# Altium PCB PCB_small.PcbDoc
Units mil, origin at the board's own origin, x right, y up, seen from the top; angles counter-clockwise.
Board outline 3000 x 3000 mil, 2 copper layers (Top Layer, Bottom Layer); 32 components, 83 nets, 236 pads, 150 vias.
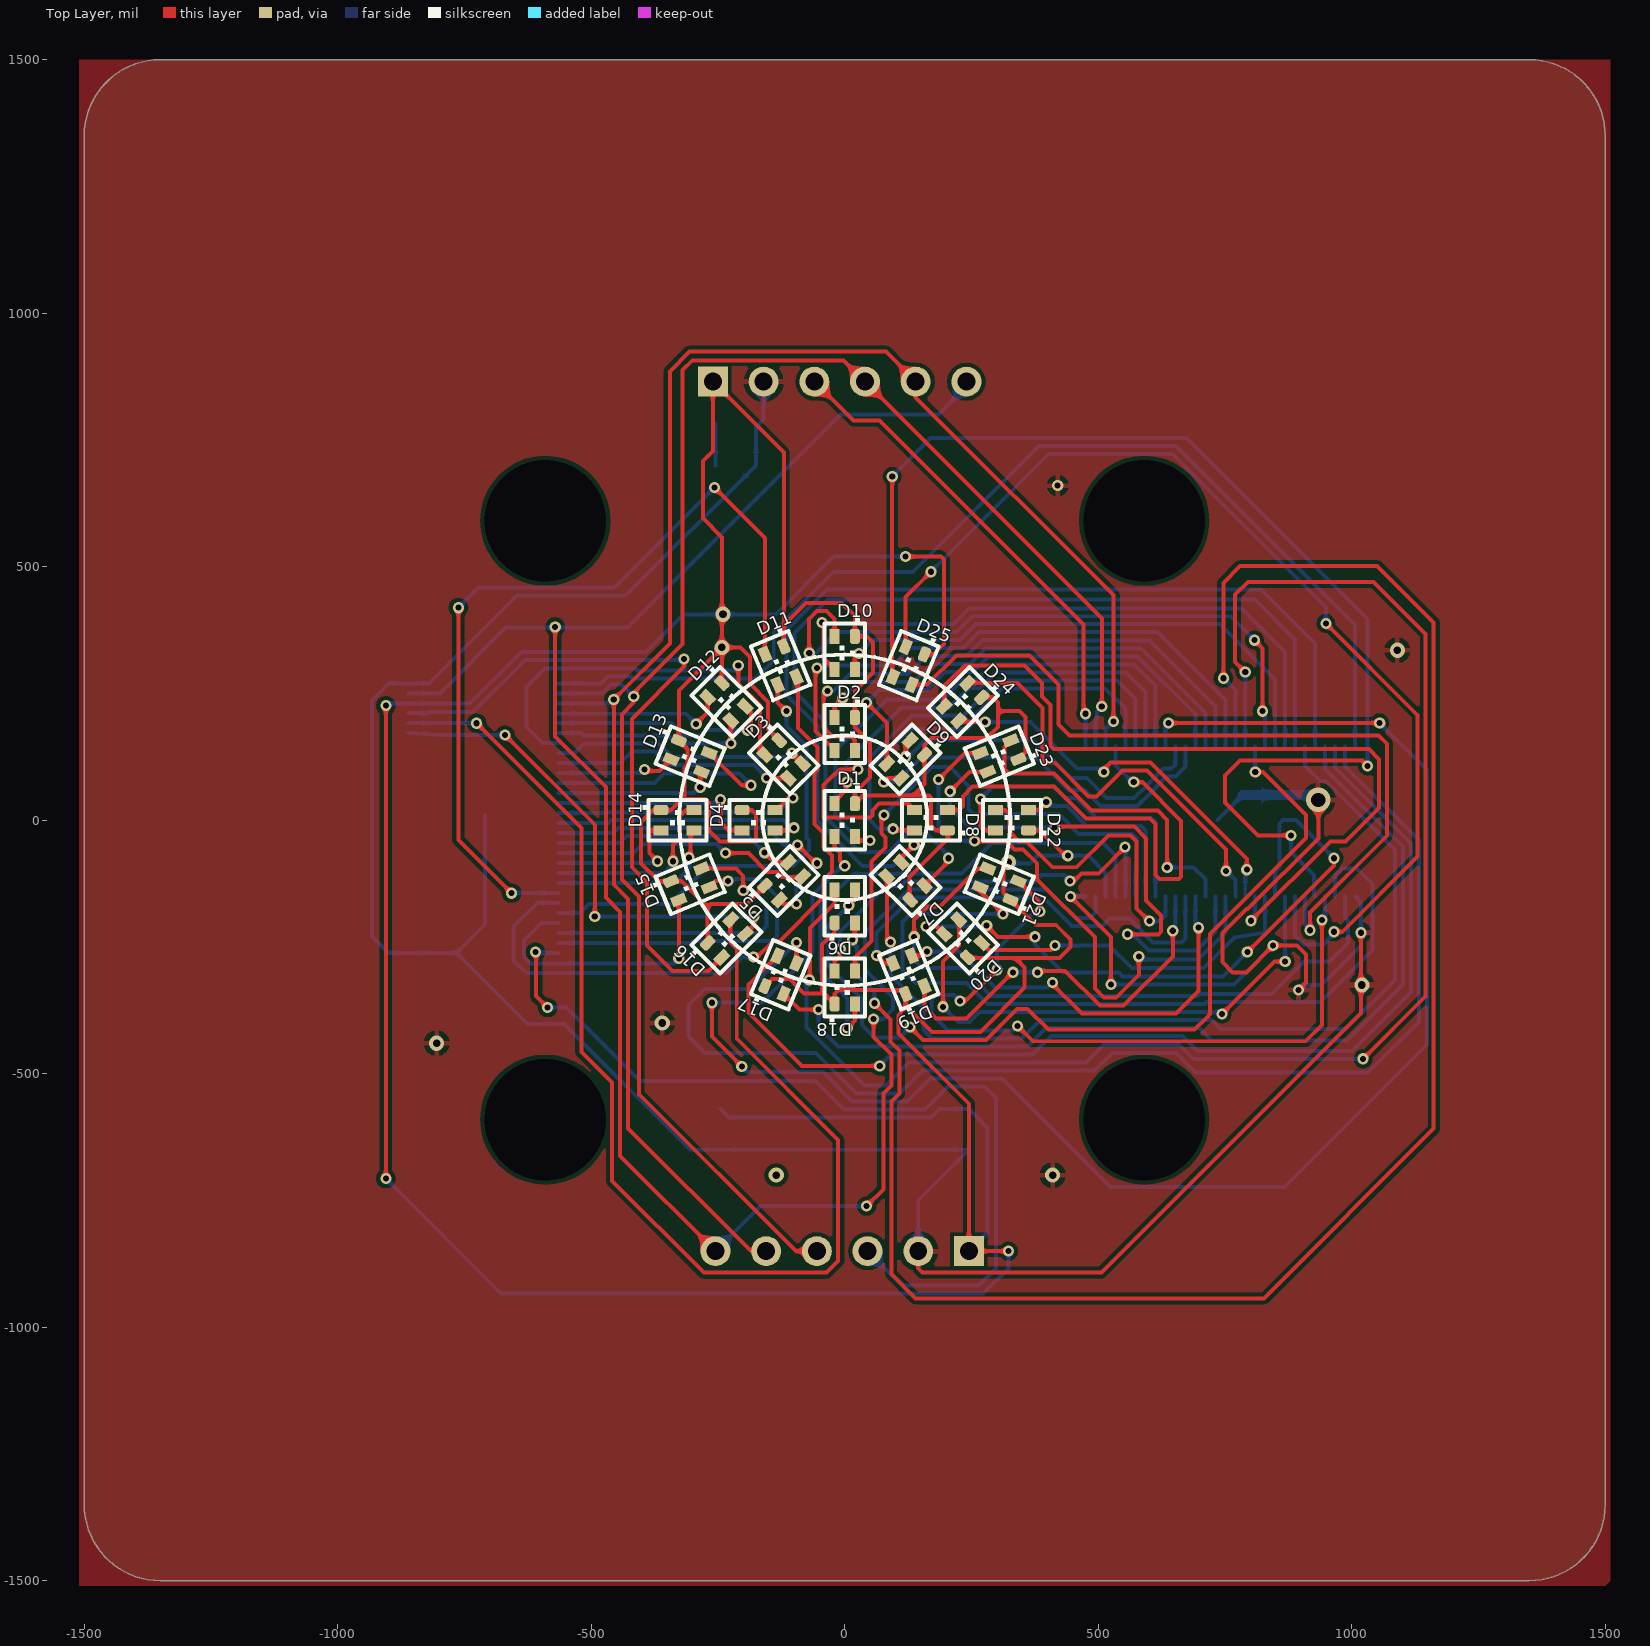
[diagram p0: Top Layer view]
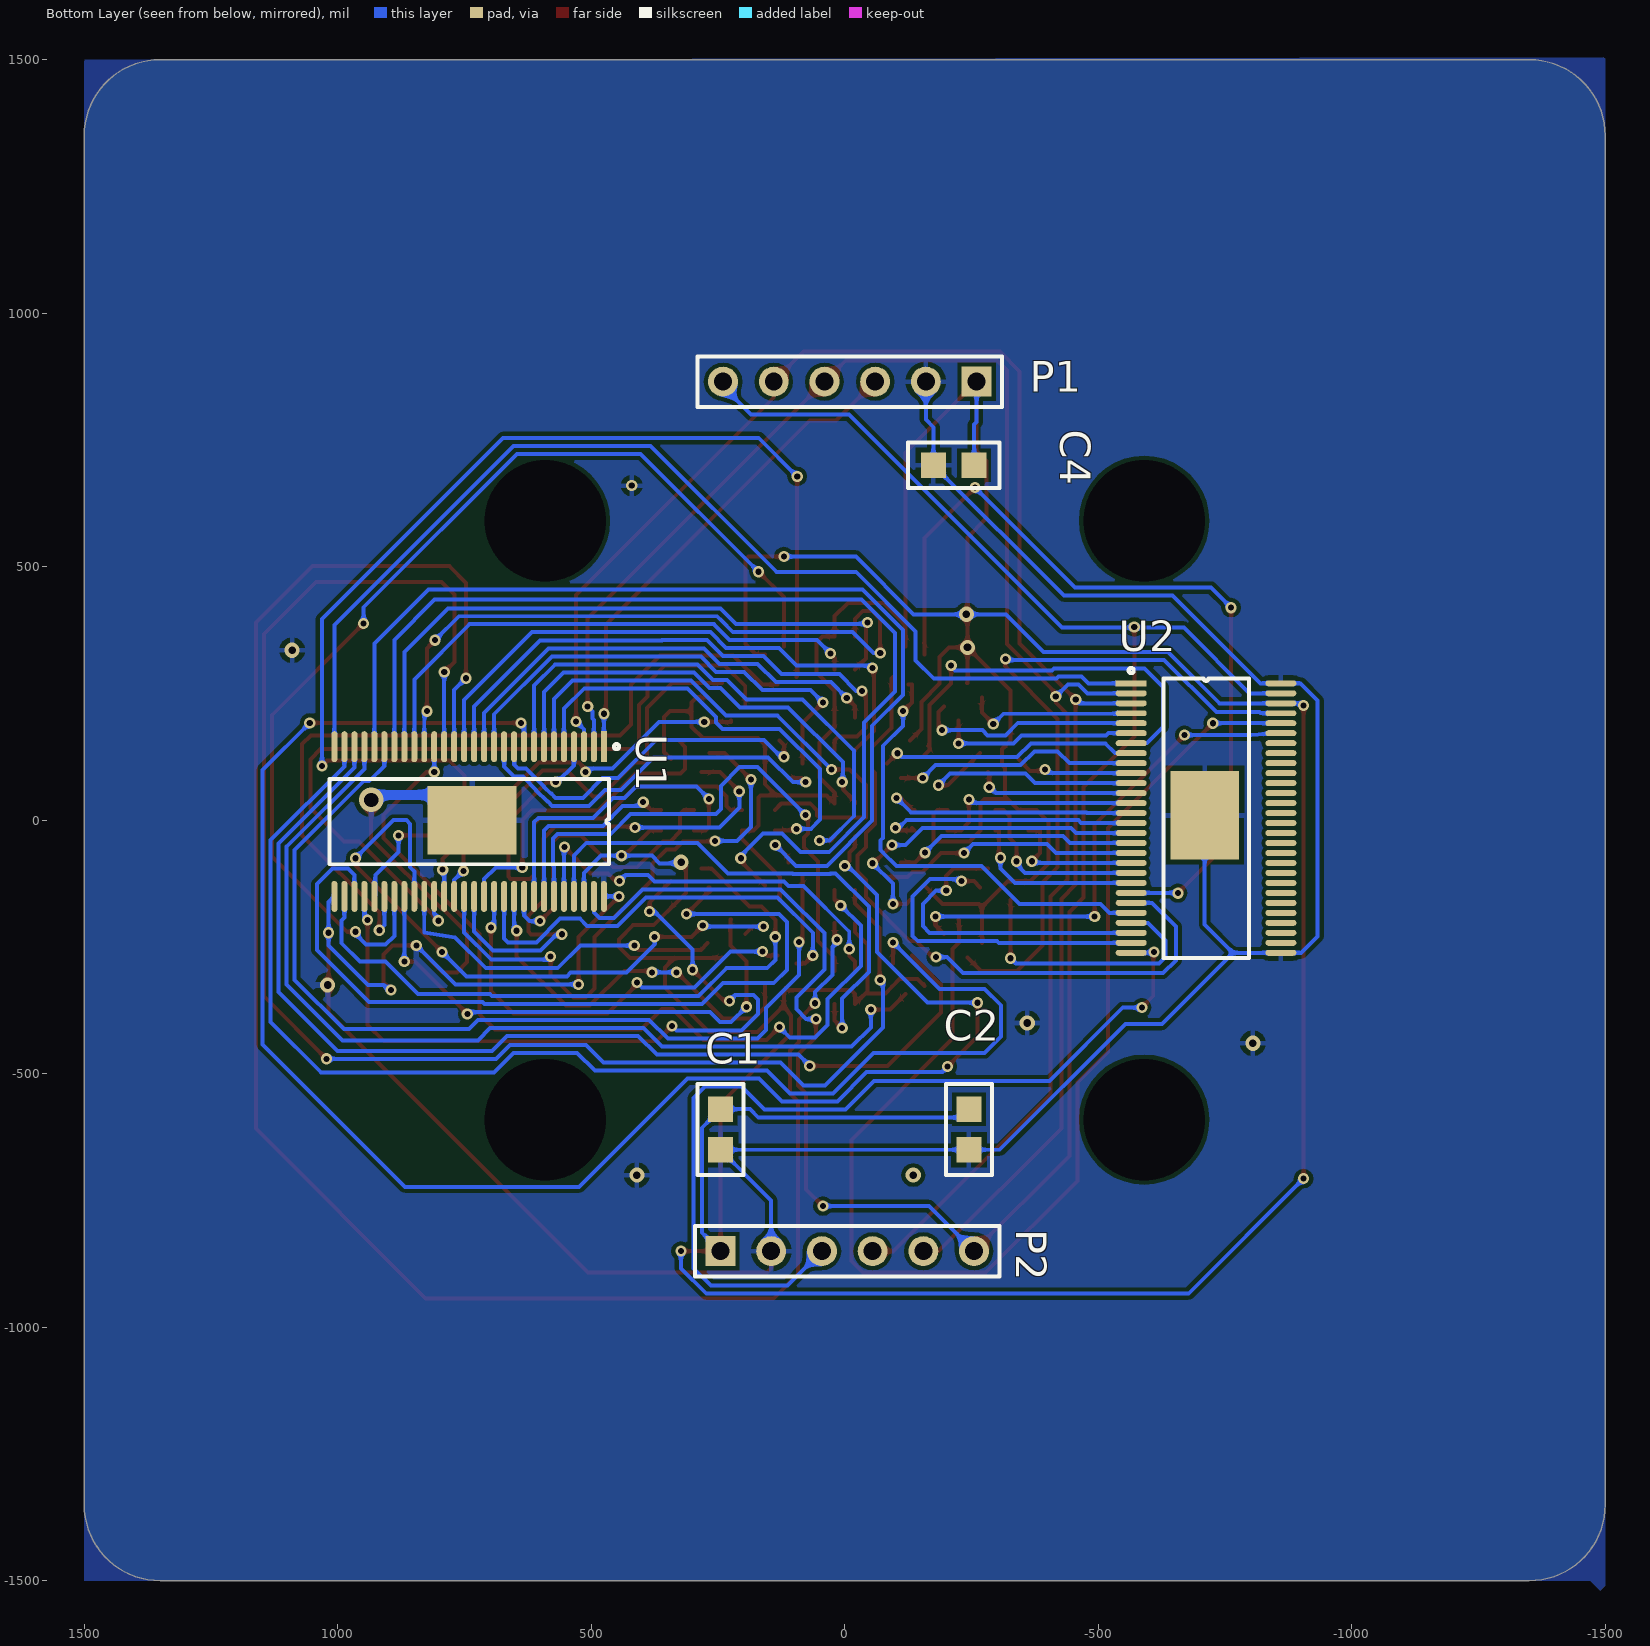
[diagram p1: Bottom Layer view, seen from below]

## Layer stack, top to bottom
Top Solder: solder mask 0.4, Solder Resist, Dk 3.5
Top Layer: signal copper 1.4
Dielectric 1: dielectric 12.6, FR-4, Dk 4.8
Bottom Layer: signal copper 1.4
Bottom Solder: solder mask 0.4, Solder Resist, Dk 3.5

## Board outline
-1350,-1500 cw(c-1350,-1350) -1500,-1350 -1500,1350 cw(c-1350,1350) -1350,1500 1350,1500 cw(c1350,1350) 1500,1350 1500,-1350 cw(c1350,-1350) 1350,-1500

## Design rules (kind name [scope] priority, off if disabled: settings)
Clearance [All] p1: gap=7.87 ignorepadtopadclearanceinfootprint=FALSE except(0: Arc-Hole Track-Hole SMDPad-Hole THPad-Hole Via-Hole Fill-Hole Poly-Hole Region-Hole Text-Hole)
ComponentClearance [All] p1: gap=0 collisioncheckmode=3 verticalgap=0 showdistances=FALSE
HoleSize [All] p1: absolutevalues=TRUE maxlimit=200 minlimit=5 maxpercent=80.000 minpercent=20.000
HoleToHoleClearance [All] p1: gap=7.87 allowstackedmicrovias=TRUE
MinimumSolderMaskSliver [All] p1: minsoldermaskwidth=7.87
PolygonConnect [All] p1: connectstyle=Relief reliefconductorwidth=10 reliefentries=4 polygonreliefangle="90 Angle" airgapwidth=10
RoutingVias [All] p1: holewidth=12 width=22 viastyle="Through Hole" minholewidth=10 minwidth=10 maxholewidth=50 maxwidth=80
SilkToSilkClearance [All] p1: silktosilkclearance=7.87
SilkToSolderMaskClearance [IsPad] p1: minsilkscreentomaskgap=7.87 clearancetoexposedcopper=TRUE
SolderMaskExpansion [All] p1: expansion=4
Width [All] p1: maxlimit=80 minlimit=5 preferedwidth=7.87
24 further rules are at their usual default settings.

## Components (designator, comment, footprint, x,y, rotation, side; value= is the part's Value field where it differs from the comment)
C1 "Cap" CAP_0805 245,-610 r90 bottom
C2 "Cap" CAP_0805 -245,-610 r90 bottom
C4 "Cap" CAP_0805 -215,700 r180 bottom
D1 "LED1616" LED1616 0,0 r90 top
D2 "LED1616" LED1616 0,170 r90 top
D3 "LED1616" LED1616 -120.21,120.21 r135 top
D4 "LED1616" LED1616 -170,0 r180 top
D5 "LED1616" LED1616 -120.21,-120.21 r225 top
D6 "LED1616" LED1616 0,-170 r270 top
D7 "LED1616" LED1616 120.21,-120.21 r315 top
D8 "LED1616" LED1616 170,0 r0 top
D9 "LED1616" LED1616 120.21,120.21 r45 top
D10 "LED1616" LED1616 0,330 r90 top
D11 "LED1616" LED1616 -126.29,304.88 r112.5 top
D12 "LED1616" LED1616 -233.35,233.35 r135 top
D13 "LED1616" LED1616 -304.88,126.29 r157.5 top
D14 "LED1616" LED1616 -330,0 r180 top
D15 "LED1616" LED1616 -304.88,-126.29 r202.5 top
D16 "LED1616" LED1616 -233.35,-233.35 r225 top
D17 "LED1616" LED1616 -126.29,-304.88 r247.5 top
D18 "LED1616" LED1616 0,-330 r270 top
D19 "LED1616" LED1616 126.29,-304.88 r292.5 top
D20 "LED1616" LED1616 233.35,-233.35 r315 top
D21 "LED1616" LED1616 304.88,-126.29 r337.5 top
D22 "LED1616" LED1616 330,0 r0 top
D23 "LED1616" LED1616 304.88,126.29 r22.5 top
D24 "LED1616" LED1616 233.35,233.35 r45 top
D25 "LED1616" LED1616 126.29,304.88 r67.5 top
P1 "Header 6" HDR1X6 -260,865 r0 bottom
P2 "Header 6" HDR1X6 245,-850 r180 bottom
U1 "Tlc5955" TCL5955-2 475,145 r270 bottom
U2 "Tlc5955" TCL5955-2 -565,270 r180 bottom

## Footprints (in the part's own frame and the unit in brackets; to place one, negate y for a bottom-side part, rotate by r counter-clockwise, add the part's x,y. Pads: shape width x height; smd on the part's side, far side on the other; paste and mask are expansions set on the pad)
CAP_0805 [mil]
  rect 50x50 smd: 1(-40,0) 2(40,0)
  silkscreen extent -90,-45 90,45
HDR1X6 [mm] "Connector; Header; 6 Position"
  rect 1.5x1.5 hole 0.9: 1(0,0)
  round 1.5 hole 0.9: 2(2.54,0) 3(5.08,0) 4(7.62,0) 5(10.16,0) 6(12.7,0)
  silkscreen extent -1.27,-1.27 13.97,1.27
LED1616 [mil]
  rrect50% 29.53x19.68 smd: 1(32.5,-20)
  rect 29.53x19.68 smd: 2(-32.5,-20) 3(-32.5,20) 4(32.5,20)
  silkscreen extent -58,-40 70,40
TCL5955-2 [mm]
  rect 1.55x0.3 smd: 1(0,0)
  oval 1.55x0.3 smd: 2(0,-0.5) 3(0,-1) 4(0,-1.5) 5(0,-2) 6(0,-2.5) 7(0,-3) 8(0,-3.5) 9(0,-4) 10(0,-4.5) 11(0,-5) 12(0,-5.5) 13(0,-6) 14(0,-6.5) 15(0,-7) 16(0,-7.5) 17(0,-8) 18(0,-8.5) 19(0,-9) 20(0,-9.5) 21(0,-10) 22(0,-10.5) 23(0,-11) 24(0,-11.5) 25(0,-12) 26(0,-12.5) 27(0,-13) 28(0,-13.5) 29(7.5,-13.5) 30(7.5,-13) 31(7.5,-12.5) 32(7.5,-12) 33(7.5,-11.5) 34(7.5,-11) 35(7.5,-10.5) 36(7.5,-10) 37(7.5,-9.5) 38(7.5,-9) 39(7.5,-8.5) 40(7.5,-8) 41(7.5,-7.5) 42(7.5,-7) 43(7.5,-6.5) 44(7.5,-6) 45(7.5,-5.5) 46(7.5,-5) 47(7.5,-4.5) 48(7.5,-4) 49(7.5,-3.5) 50(7.5,-3) 51(7.5,-2.5) 52(7.5,-2) 53(7.5,-1.5) 54(7.5,-1) 55(7.5,-0.5) 56(7.5,0)
  rect 3.429x4.445 smd: 57(3.683,-6.604)
  silkscreen extent -0.13,-13.75 5.89,0.76

## Part data
C1 C2 C4: "Capacitor"
D1 D2 D3 D4 D5 D6 D7 D8 D9 D10 D11 D12 D13 D14 D15 D16 D17 D18 D19 D20 D21 D22 D23 D24 D25: library part LED
P1 P2: "Header, 6-Pin"
U1 U2: library part Tlc5955_2

## Free pads (board coordinates)
  round 78.74 hole 240: 0(-590.55,-590.55) 0(-590.55,590.55) 0(590.55,-590.55) 0(590.55,590.55)

## Via types
v1: diameter 22, hole 12, Top Layer to Bottom Layer, 140 vias
v2: diameter 30, hole 15, Top Layer to Bottom Layer, 9 vias
v3: diameter 48, hole 28, Top Layer to Bottom Layer, 1 vias

## Nets (pads, with @x,y where several pads share a name; then routed paths per layer and width w, separated by ;. In a path a pad name is that pad's centre, name@x,y a point inside that pad or via, vN(x,y) a via of type N, cw(c..) or ccw(c..) an arc to the next point about the centre after c; other vN are vias at no path point)
D1_B: D1.4 U1.7 | length 879.7
  Top Layer w7.87: D1.4 -20,37 2.66,59.66 2.66,72.66 v1(5,75)
  Bottom Layer w7.87: v1(5,75) 3.46,76.54 3.46,114.49 111.53,222.56 206.63,222.56 245.14,261.07 266.53,261.07 296.95,291.5 554.23,291.5 593.11,252.62 U1.7
D1_G: D1.3 U1.9 | length 3397
  Top Layer w7.87: v1(-262,-360) -262,-427 v1(-203,-486) ; D1.3 -20,-52.73 -9.25,-63.48 -9.25,-80.75 v1(0,-90) v1@-6,-90 ; v1(638.75,191.75) v1(1055.14,191.75)
  Bottom Layer w7.87: v1(-262,-360) -163.56,-360 -63.22,-259.66 -63.22,-147.22 v1@-6,-90 ; v1(-203,-486) -191.94,-497.06 -43.13,-497.06 14.69,-554.88 123.31,-554.88 168.7,-509.49 310.49,-509.49 524,-723 867,-723 1147.99,-442.01 1147.99,98.9 v1(1055.14,191.75) ; U1.9 632.48,185.48 v1(638.75,191.75)
D1_R: D1.2 U1.8 | length 1089.1
  Top Layer w7.87: D1.2 27.5,-40 v1(50,-40)
  Bottom Layer w7.87: v1(50,-40) 30,-40 -17.81,7.81 -17.81,137.55 82.95,238.31 193.31,238.31 231.82,276.82 260.01,276.82 290.43,307.24 570.97,307.24 612.79,265.42 U1.8
D2_B: D2.4 U1.13 | length 920.1
  Top Layer w7.87: D2.4 -20,225 v1(-4,241)
  Bottom Layer w7.87: v1(-4,241) 27.16,272.16 135.77,272.16 171.93,308.32 246.96,308.32 277.39,338.74 584.02,338.74 711.22,211.54 U1.13
D2_G: D2.3 U1.15 | length 1161.1
  Top Layer w7.87: v1(-55,300) -57.4,297.6 -57.4,176.32 -20,138.92 D2.3
  Bottom Layer w7.87: v1(-55,300) -50,305 7.38,305 95,305 129.81,339.81 233.91,339.81 264.85,370.75 300.75,370.75 616.55,370.75 750.59,236.71 U1.15
D2_R: D2.2 U1.14 | length 1107.2
  Top Layer w7.87: v1(-34.13,255) -41.65,247.47 -41.65,222.16 -41.65,182.84 -23.81,165 12,165 20,157 D2.2
  Bottom Layer w7.87: v1(-34.13,255) -22.26,255 10.64,287.9 124.24,287.9 124.37,288.03 160.4,324.06 240.44,324.06 271.37,355 310,355 360,355 360.51,354.49 601.06,354.49 730.9,224.65 U1.14
D3_B: D6.4 U1.16 | length 3774.4
  Top Layer w7.87: v1(15,-235.67) 18.67,-235.67 20,-234.34 D6.4 ; v1(58.44,-361.06) 90.44,-393.06 90.44,-437 107.56,-454.12 107.56,-539.13 92,-554.69 92,-895 140,-943 827,-943 1161.5,-608.5 1161.5,389.5 1050,501 780,501 747,468 v1(747,280)
  Bottom Layer w7.87: v1(15,-235.67) 15,-241.34 24.21,-250.55 24.21,-305.03 58.44,-339.26 v1(58.44,-361.06) ; v1(747,280) 770.27,256.73 U1.16
D3_G: D6.3 U1.18 | length 1742.6
  Top Layer w7.87: v1(8,-168) 20,-156 D6.3 ; v1(129,-408) 154.31,-433.31 278.63,-433.31 339.93,-372 360.81,-372 401.99,-413.18 689.66,-413.18 714.14,-388.7 720.81,-382.03 720.81,-224.19 910,-35 910,10 825,95 v1(809.64,95)
  Bottom Layer w7.87: v1(8,-168) -31.72,-207.72 -31.73,-287.27 33.77,-352.77 33.77,-404 58.33,-428.56 108.44,-428.56 v1(129,-408) ; v1(809.64,95) U1.18
D3_R: D6.2 U1.17 | length 3112.3
  Top Layer w7.87: v1(-70,-315) -68.82,-313.82 -68.82,-212.82 -20,-164 D6.2 ; v1(789.96,292.33) 770,312.29 770,445 795,470 1043,470 1145.75,367.25 1145.75,-347.25 v1(1022.38,-470.62)
  Bottom Layer w7.87: v1@-68.82,-313.82 v1(-70,-315) -75.53,-320.53 -75.53,-409.31 38.54,-523.39 81.23,-523.39 126.62,-477.99 475.62,-477.99 510.63,-442.99 660.14,-442.99 687.77,-470.62 v1(1022.38,-470.62) ; U1.17 v1(789.96,292.33)
D4_B: D7.4 U1.22 | length 2030.1
  Top Layer w7.87: D7.4 205,-81.38 v1(205,-75)
  Bottom Layer w7.87: v1(205,-75) 205,-70 161.19,-26.19 123.81,-26.19 87.19,-62.81 30.54,-62.81 -38.25,5.98 -38.25,192.78 -98.86,253.4 -98.86,368.86 -32.73,435 809.25,435 888.38,355.87 U1.22
D4_G: D7.3 U1.24 | length 2015.8
  Top Layer w7.87: D7.3 111.37,-73.63 136,-49 v1(137,-49)
  Bottom Layer w7.87: v1@136,-49 v1(137,-49) 96,-90 35,-90 -54,-1 -54,186.26 -115,247.26 -115,375 -35,455 226.28,455 821,455 881,395 927.75,348.25 U1.24
D4_R: D7.2 U1.23 | length 1878.8
  Top Layer w7.87: D7.2 83.09,-242.09 85.17,-240 v1(90,-240)
  Bottom Layer w7.87: v1(90,-240) 90,-305 155,-370 155,-374 155,-413.75 172,-430.75 349,-430.75 385.68,-394.06 723,-394.06 740.94,-412 988,-412 1085,-315 1085,-58.88 949.31,76.81 938.19,76.81 908.07,106.93 U1.23
D5_B: D8.4 U1.4 | length 949.3
  Top Layer w7.87: D8.4 225,20 233,28 233,47 252,66 412.81,66 475.87,2.94 602.37,2.94 613,-7.69 613,-108 621,-116 659,-116 663.59,-111.41 663.59,-1.15 587.44,75 v1(570,75)
  Bottom Layer w7.87: U1.4 534.05,108 567.05,75 v1(570,75)
D5_G: D8.3 U1.6 | length 1076.7
  Top Layer w7.87: v1(26.27,100) -9,100 -19,90 -20,91 -41.66,69.34 -41.66,5 50,5 54.67,9.67 54.67,19.45 68.03,32.81 124.69,32.81 D8.3
  Bottom Layer w7.87: v1(26.27,100) 133.08,206.81 234.54,206.81 303.48,275.75 536.68,275.75 573.42,239 U1.6
D5_R: D8.2 U1.5 | length 865.4
  Top Layer w7.87: v1(95,-17) 98,-20 D8.2
  Bottom Layer w7.87: v1(95,-17) 67,-17 49.08,0.92 49.08,100.54 128.54,180 241,180 254,193 254,204 310,260 513.74,260 553.74,220 U1.5
D6_B: D9.4 U1.10 | length 692
  Top Layer w7.87: v1(120,125) 120,148.28 D9.4
  Bottom Layer w7.87: v1(120,125) 125.88,125 159.15,158.27 371.73,158.27 446.75,83.25 477.37,83.25 516.43,44.19 570.48,44.19 578.48,52.19 579.45,52.19 592.81,65.55 592.81,66.52 616.81,90.52 628.29,102 644,102 652.16,110.16 U1.10
D6_G: D9.3 U1.12 | length 934.6
  Top Layer w7.87: v1(43,232) 83.09,191.91 D9.3
  Bottom Layer w7.87: v1(43,232) 67.41,256.41 162.1,256.41 198.26,292.57 253.48,292.57 283.91,322.99 577.5,322.99 691.53,208.95 U1.12
D6_R: D9.2 U1.11 | length 763.9
  Top Layer w7.87: v1(77,75) 85.09,83.09 D9.2
  Bottom Layer w7.87: v1(77,75) 102.26,75 150.9,123.64 377.36,123.64 441.07,59.93 472.68,59.93 504.17,28.44 577,28.44 585,36.44 585.97,36.44 608.56,59.03 608.56,60 632.56,84 634.56,86 652,86 671.85,105.85 U1.11
D7_B: D10.4 U1.19 | length 1311.2
  Top Layer w7.87: v1(-70,330) -70,397.26 -54.45,412.81 -35.55,412.81 -20,397.26 D10.4 ; v1(808,355) 824,339 v1(824,215)
  Bottom Layer w7.87: v1(-70,330) -56.38,330 -15.07,371.31 220.87,371.31 242.07,392.51 251.8,402.24 277.24,402.24 654.67,402.24 760.76,402.24 v1(808,355) ; v1(824,215) 829.33,209.67 U1.19
D7_G: D10.3 U1.21 | length 1255.1
  Top Layer w7.87: v1(-45,390) -39.4,384.4 -41.65,382.16 -41.65,319.15 D10.3
  Bottom Layer w7.87: v1(-45,390) -42.06,387.06 214.35,387.06 244.77,417.48 245.28,417.99 267.99,417.99 670.41,417.99 782.71,417.99 868.7,332 U1.21
D7_R: D10.2 U1.20 | length 1057.5
  Top Layer w7.87: D10.2 20,321 v1(28,329)
  Bottom Layer w7.87: v1(28,329) 54.56,355.56 227.39,355.56 257.82,385.98 258.33,386.5 286.5,386.5 638.92,386.5 740.32,386.5 849.01,277.8 U1.20
D8_B: D17.4 U1.25 | length 1888.1
  Top Layer w7.87: D17.4 -89.25,-373.56 v1(-51.44,-373.56)
  Bottom Layer w7.87: v1(-51.44,-373.56) -51.44,-408.56 -13.5,-446.5 360.25,-446.5 396.93,-409.81 699.25,-409.81 723.62,-434.18 990.82,-434.18 1100.75,-324.25 1100.75,-52.36 947.44,100.95 U1.25
D8_G: D17.3 U1.27 | length 2547.7
  Top Layer w7.87: D17.3 v1(-95.37,-241)
  Bottom Layer w7.87: v1(-95.37,-241) -187.37,-333 -276,-333 -308,-365 -308,-426.74 -276,-458.74 -57.15,-458.74 23.24,-539.13 107.56,-539.13 152.95,-493.74 492.88,-493.74 527.88,-458.74 653.23,-458.74 691.99,-497.5 1032.5,-497.5 1132.24,-397.76 1132.24,-39.31 986.81,106.12 U1.27
D8_R: D17.2 U1.26 | length 2115.5
  Top Layer w7.87: D17.2 -154.98,-289.86 -155.22,-289.86 -164.91,-299.54 -182.25,-316.88 -189.43,-324.06 -189.43,-379.15 -84,-484.57 v1(69,-484.57)
  Bottom Layer w7.87: v1(69,-484.57) 91.33,-462.24 370.65,-462.24 407.34,-425.56 666.59,-425.56 695.9,-454.87 1000.13,-454.87 1116.5,-338.5 1116.5,-45.84 967.12,103.53 U1.26
D9_B: D18.4 U1.53 | length 1040.2
  Top Layer w7.87: v1(5,-410) 20,-395 D18.4
  Bottom Layer w7.87: v1(5,-410) 5,-352 -47.47,-299.53 -47.47,-266.18 -47.47,-170.47 18,-105 27.73,-105 28.48,-105.75 102.52,-105.75 103.27,-105 230,-105 290,-45 340,-45 509.81,-45 534.05,-69.24 U1.53
D9_G: D18.3 U1.51 | length 1075.5
  Top Layer w7.87: D18.3 20,-270.81 52.81,-238 52.81,-81.21 80,-54.03 80,-34.26 72.19,-26.45 72.19,4.71 v1(77.48,10)
  Bottom Layer w7.87: v1(77.48,10) 172,104.52 207.35,104.52 244,67.87 244,22.19 253.8,12.39 422.31,12.39 461.5,-26.8 566.62,-26.8 575.81,-36 575.81,-89.42 573.42,-91.81 U1.51
D9_R: D18.2 U1.52 | length 820.5
  Top Layer w7.87: D18.2 -20,-279 -8.91,-267.91 v1(-8.91,-254.01) ; v1(444.31,-120) 452.27,-120 467.27,-105 501,-105 v1(553,-53)
  Bottom Layer w7.87: v1(-8.91,-254.01) -8.91,-220 81.68,-129.4 111.06,-129.4 119.71,-120.75 375.63,-120.75 388.19,-108.19 432.5,-108.19 v1(444.31,-120) ; v1(553,-53) 553.74,-53.74 U1.52
D10_B: D19.4 U1.47 | length 769.6
  Top Layer w7.87: D19.4 157.2,-368.07 180.05,-390.91 240.09,-390.91 331,-300 v1(332,-300) ; v1(380,-300) 382.81,-297.19 434.2,-297.19 434.42,-296.98 503.37,-365.93 550.19,-365.93 647,-269.12 v1(647,-218)
  Bottom Layer w7.87: v1@331,-300 v1(332,-300) v1(380,-300) ; v1(647,-218) 652.16,-212.84 U1.47
D10_G: D19.3 U1.45 | length 931.6
  Top Layer w7.87: D19.3 153.93,-267.2 v1(162,-259.13) ; v1(410,-320) v1@405.91,-320 ; v1(698,-212) 698,-337.31 653.63,-381.68 467.59,-381.68 ; v1@405.91,-320 407.96,-322.04 467.59,-381.68 ; v1@405.91,-320 467.59,-381.68
  Bottom Layer w7.87: v1(162,-259.13) 225.69,-259.13 296.56,-330 400,-330 v1(410,-320) ; U1.45 691.53,-205.53 v1(698,-212)
D10_R: D19.2 U1.46 | length 856.2
  Top Layer w7.87: v1(63,-267) 78.51,-282.51 D19.2
  Bottom Layer w7.87: v1(63,-267) 63,-222 132.76,-152.24 392.24,-152.24 448.35,-208.35 508.47,-208.35 522.63,-194.19 561.26,-194.19 607.9,-240.82 664.47,-240.82 671.85,-233.44 U1.46
D11_B: D20.4 U1.38 | length 683.8
  Top Layer w7.87: D20.4 283.93,-255.65 406.54,-255.65 v1(415,-247.18)
  Bottom Layer w7.87: v1(415,-247.18) 521.55,-247.18 566.36,-292 707.69,-292 768.44,-231.25 829.33,-221.67 U1.38
D11_G: D20.3 U1.36 | length 1054.1
  Top Layer w7.87: v1(194,-368.06) 194,-279 225.43,-247.57 225.43,-196.22 D20.3 ; v1@740.7,-378.32 v1(744.38,-382) 847.63,-278.75 v1(868.7,-278.75)
  Bottom Layer w7.87: v1(194,-368.06) 224.34,-398.4 246.02,-398.4 266.11,-378.32 v1@740.7,-378.32 ; v1(868.7,-278.75) U1.36
D11_R: D20.2 U1.37 | length 1291.3
  Top Layer w7.87: v1(160,-210) 181.72,-210 D20.2 ; v1(280,-208) 302,-230 v1(375,-230) ; v1(794,-260) 965,-89 v1(965,-75)
  Bottom Layer w7.87: v1(160,-210) 278,-210 v1(280,-208) ; v1(375,-230) 375,-245 430.7,-300.7 540.82,-300.7 548.12,-308 746,-308 v1(794,-260) ; U1.37 849.01,-100.98 857.19,-92.81 857.19,-7.19 864.38,0 890,0 v1(965,-75)
D12_B: D21.4 U1.32 | length 1493.8
  Top Layer w7.87: v1(227.5,-356.5) 238.5,-356.5 v1(300,-295) ; v1(341,-406) 371,-436 909,-436 941,-404 v1(941,-197) ; D21.4 385,-162.69 v1(385,-180)
  Bottom Layer w7.87: v1(227.5,-356.5) 216,-345 180,-345 171,-354 171,-382 204,-415 332,-415 v1(341,-406) ; v1(300,-295) 300,-255 375,-180 v1(385,-180) ; v1(941,-197) 947.44,-190.56 U1.32
D12_G: D21.3 U1.30 | length 1289.1
  Top Layer w7.87: v1(137,-230) 137,-197 164.07,-169.93 188,-169.93 262.56,-95.37 D21.3
  Bottom Layer w7.87: v1(137,-230) 137,-276 153,-292 233.27,-292 288.08,-346.81 696.19,-346.81 700,-343 842,-343 906,-279 956,-279 992.29,-242.71 992.29,-197.48 986.81,-192 U1.30
D12_R: D21.2 U1.31 | length 1634.6
  Top Layer w7.87: D21.2 269,-132.33 269,-142 v1(312,-185)
  Bottom Layer w7.87: v1(312,-185) 130,-185 114,-201 114,-295.31 140,-321.31 240.31,-321.31 281.56,-362.56 710.44,-362.56 714,-359 865,-359 938,-359 1040.81,-256.19 1040.81,-125.81 1009.88,-94.88 980.12,-94.88 967.12,-107.88 U1.31
D13_B: D22.4 U1.50 | length 390.3
  Top Layer w7.87: D22.4 382,20 v1(397.5,35.5)
  Bottom Layer w7.87: v1(397.5,35.5) 404.87,28.13 438,28.13 477.19,-11.06 584.17,-11.06 593.11,-20 U1.50
D13_G: D22.3 U1.48 | length 617.3
  Top Layer w7.87: D22.3 317,20 325,12 325,-22.6 344.06,-41.65 358.21,-41.65 361.56,-45 409.37,-92.81 457.19,-92.81 519.81,-30.19 564,-30.19 575.81,-42 575.81,-173.81 v1(601,-199)
  Bottom Layer w7.87: v1(601,-199) 621.48,-199 632.48,-188 U1.48
D13_R: D22.2 U1.49 | length 617.8
  Top Layer w7.87: v1(268,42) 268,-13 275,-20 D22.2
  Bottom Layer w7.87: v1(268,42) 292.52,66.52 411.77,66.52 434.41,43.88 456.94,43.88 496.13,4.69 604.1,4.69 612.79,-4 U1.49
D14_B: D23.4 U1.44 | length 647.9
  Top Layer w7.87: D23.4@316,157.2 D23.4 314.85,144.8 314.85,101.15 324,92 412.98,92 486.29,18.69 618.03,18.69 636,0.71 v1(636,-93)
  Bottom Layer w7.87: v1(636,-93) 688.22,-93 711.22,-116 U1.44
D14_G: D23.3 U1.42 | length 1131.3
  Top Layer w7.87: v1(185,80) 237.33,132.33 D23.3 ; v1(255.83,-40.83) 256.65,-41.65 315.65,-41.65 319.31,-41.65 335.05,-57.4 351.69,-57.4 379.23,-84.94 379.23,-86.46 379.23,-116.77 493.19,-230.72 493.19,-332 511.37,-350.18 534.63,-350.18 580,-304.81 v1(580,-269)
  Bottom Layer w7.87: v1(185,80) 185,-13.65 212.17,-40.83 v1(255.83,-40.83) ; v1(580,-269) 586.19,-275.19 697.18,-275.19 750.59,-221.78 U1.42
D14_R: D23.2 U1.43 | length 1069.8
  Top Layer w7.87: v1(208,57) 246.37,95.37 D23.2 ; v1(413.44,-14.44) 415.07,-12.81 571.16,-12.81 594.35,-36 594.35,-158.35 623.81,-187.81 623.81,-219.68 618.47,-225.02 v1(558.04,-225.02)
  Bottom Layer w7.87: v1(208,57) 208,24.64 247.08,-14.44 v1(413.44,-14.44) ; v1(558.04,-225.02) 568.51,-225.02 600.06,-256.57 693.53,-256.57 730.9,-219.19 U1.43
D15_B: D24.4 U1.41 | length 847.8
  Top Layer w7.87: D24.4 340.56,270.47 390,221.03 390,119.31 396,113.31 414.44,113.31 481.25,46.5 496.5,46.5 547.81,97.81 596.19,97.81 752,-58 v1(752,-100)
  Bottom Layer w7.87: v1(752,-100) 770.27,-118.27 U1.41
D15_G: D24.3 U1.39 | length 1546.1
  Top Layer w7.87: D24.3 196.22,264.22 237,305 355,305 389,271 389,244.3 405.75,227.56 405.75,146.25 412,140 1033.81,140 1054.09,119.73 1054.09,74.09 1054.09,24.09 987.81,-42.19 957.7,-42.19 v1(801.59,-198.29)
  Bottom Layer w7.87: v1(801.59,-198.29) 801.59,-192.41 809.64,-184.36 U1.39
D15_R: D24.2 U1.40 | length 781.9
  Top Layer w7.87: D24.2 224.51,194 v1(277,194) ; v1(511,95) 511,100.56 524,113.56 602.71,113.56 793,-76.73 v1(793,-97.59)
  Bottom Layer w7.87: v1(277,194) 366,194 458,102 504,102 v1(511,95) v1@511,100.56 ; U1.40 789.96,-100.63 v1(793,-97.59)
D16_B: D25.4 U1.35 | length 2139.9
  Top Layer w7.87: D25.4 120.25,440.25 v1(170,490) ; v1(949,388) 1130,207 1130,-72 982,-220 v1(965,-220)
  Bottom Layer w7.87: v1(170,490) 402.36,722.36 646.64,722.36 949,420 v1(949,388) ; U1.35 888.38,-228 905.38,-245 944,-245 965,-224 v1(965,-220) v1@969,-220
D16_G: D25.3 U1.33 | length 2453.1
  Top Layer w7.87: D25.3 93.69,284.19 v1(93.69,677.95) v1@95.37,679.63 ; v1(880,-30) 815,-30 750,35 750,69 750,88 780,118 1020,118 v1(1031,107)
  Bottom Layer w7.87: v1(93.69,677.95) 169.6,753.86 674.21,753.86 1031,397.07 v1(1031,107) ; v1(880,-30) 880,-62.54 925.79,-108.33 925.79,-148.31 U1.33
D16_R: D25.2 U1.34 | length 1581.2
  Top Layer w7.87: D25.2 162.2,267.2 220,325 364,325 421.5,267.5 421.5,188.5 443,167 1053,167 1070,150 1070,-30 918,-182 v1(918,-217)
  Bottom Layer w7.87: U1.34 908.07,-207.07 v1(918,-217)
D17_B: D3.4 U2.7 | length 790.7
  Top Layer w7.87: v1(-210,305) -210,270 -167.01,227.01 -167.01,138.73 D3.4
  Bottom Layer w7.87: U2.7 -596,151.89 -628,183.89 -628,262.88 -591.57,299.31 -412.87,299.31 -408.76,295.19 -217.06,295.19 v1@-210,302.25
D17_G: D3.3 U2.9 | length 485.1
  Top Layer w7.87: v1(-153.95,83.09) D3.3
  Bottom Layer w7.87: U2.9 -443.1,112.52 -419.81,135.81 -374.19,135.81 -346.82,108.44 -179.3,108.44 v1(-153.95,83.09)
D17_R: D3.2 U2.8 | length 513.1
  Top Layer w7.87: v1(-103.71,132) D3.2
  Bottom Layer w7.87: U2.8 -533.21,132.2 -513.85,151.56 -367.37,151.56 -340,124.19 -111.53,124.19 v1(-103.71,132)
D18_B: D4.4 U2.13 | length 417.1
  Top Layer w7.87: v1(-245,41) -245,-4 -229,-20 D4.4
  Bottom Layer w7.87: U2.13 -252.22,33.78 v1(-245,41)
D18_G: D4.3 U2.15 | length 520.1
  Top Layer w7.87: D4.3@-132.5,-15 D4.3 -105,-20 v1(-100,-15)
  Bottom Layer w7.87: U2.15 -466.29,-5.59 -460.79,-0.1 -121.8,-0.1 -106.9,-15 v1(-100,-15)
D18_R: D4.2 U2.14 | length 520.8
  Top Layer w7.87: D4.2 -134,20 -110,44 v1(-102,44)
  Bottom Layer w7.87: U2.14 -478.1,14.09 -476.54,15.65 -130.35,15.65 v1(-102,44)
D19_B: D5.4 U2.16 | length 676.3
  Top Layer w7.87: D5.4 -121.38,-165 v1(-95,-165) ; v1(-93,-49) -57,-85 v1(-55,-85)
  Bottom Layer w7.87: U2.16 -455.89,-25.28 -446.46,-15.85 -153.27,-15.85 -120.12,-49 v1(-93,-49) ; v1(-95,-165) -95,-125 v1(-55,-85)
D19_G: D5.3 U2.18 | length 516.4
  Top Layer w7.87: v1(-235.19,-65) -190,-65 -153.13,-101.87 -134.13,-101.87 -123.71,-112.29 -84.01,-112.29 D5.3
  Bottom Layer w7.87: U2.18 -416.46,-64.65 -399.15,-47.34 -252.85,-47.34 v1(-235.19,-65)
D19_R: D5.2 U2.17 | length 480.5
  Top Layer w7.87: v1(-158,-64.08) -139,-83.08 D5.2
  Bottom Layer w7.87: U2.17 -444.08,-44.96 -430.71,-31.59 -190.49,-31.59 v1(-158,-64.08)
D20_B: D11.4 U2.22 | length 1672.1
  Top Layer w7.87: v1(-762,419.1) -762,-39 v1(-657,-144) v1@-656.39,-143.39 ; v1(-257,656) -157.2,556.2 -157.2,454.2 D11.4
  Bottom Layer w7.87: v1(-762,419.1) -722.36,458.74 -454.26,458.74 v1(-257,656) ; v1@-656.39,-143.39 U2.22
D20_G: D11.3 U2.24 | length 904
  Top Layer w7.87: D11.3@-126,267.2 D11.3 -132.33,232.33 v1(-115,215)
  Bottom Layer w7.87: U2.24 -522,-182.76 -504.24,-165 -345,-165 -270,-90 -101.74,-90 -75,-63.26 -70.19,-58.45 -70.19,-39.55 -75,-34.74 -75,-6 -75,146 -115,186 v1(-115,215)
D20_R: D11.2 U2.23 | length 1333.2
  Top Layer w7.87: v1(-180,-270) -172.68,-270 -140.66,-237.98 -127.98,-237.98 -41.65,-151.65 -41.65,-117.84 -25,-101.19 -25,-70 -41.65,-53.35 -41.65,-25.58 -60,-7.23 -60,93.34 -53.87,99.47 -53.87,143.87 -86.81,176.81 -92.19,182.19 -92.19,279.33 D11.2
  Bottom Layer w7.87: U2.23 -606.14,-163.07 -653.19,-210.12 -653.19,-276.31 -628,-301.5 -233.5,-301.5 -202,-270 v1(-180,-270)
D21_B: D12.4 U2.4 | length 342.8
  Top Layer w7.87: v1(-293,190) -270.47,212.53 D12.4
  Bottom Layer w7.87: U2.4 -565,209.95 -312.95,209.95 v1(-293,190)
D21_G: D12.3 U2.6 | length 393.6
  Top Layer w7.87: v1(-224.51,151.44) D12.3
  Bottom Layer w7.87: U2.6 -519.85,171.57 -515.59,167.31 -348.8,167.31 -332.94,151.44 v1(-224.51,151.44)
D21_R: D12.2 U2.5 | length 441.8
  Top Layer w7.87: D12.2 -185,213.28 -185,184.5 v1(-192,177.5)
  Bottom Layer w7.87: U2.5 -341.26,191.26 -317.19,167.19 -281.88,167.19 -271.57,177.5 v1(-192,177.5)
D22_B: D13.4 U2.10 | length 241.8
  Top Layer w7.87: v1@-397,97 -365.81,97 D13.4
  Bottom Layer w7.87: U2.10 -402.17,92.83 v1(-395,100) ; v1@-395,94.79 v1@-390.21,94.79
D22_G: D13.3 U2.12 | length 316.2
  Top Layer w7.87: v1(-285,65) -285,92.88 D13.3
  Bottom Layer w7.87: U2.12 -298.04,53.46 -286.51,65 v1(-285,65)
D22_R: D13.2 U2.11 | length 505.6
  Top Layer w7.87: D13.2 -203.87,69 v1(-185,69)
  Bottom Layer w7.87: U2.11 -375.23,73.15 -356.56,91.81 -207.81,91.81 v1(-185,69)
D23_B: D14.4 U2.19 | length 287.5
  Top Layer w7.87: v1@-372.33,-84.33 v1(-369,-81) -385,-65 -385,-20 D14.4
  Bottom Layer w7.87: U2.19 v1@-372.33,-84.33
D23_G: D14.3 U2.21 | length 352.6
  Top Layer w7.87: v1(-307,-74) -304,-71 -304,-20 D14.3
  Bottom Layer w7.87: U2.21 -335.78,-123.7 -307,-94.92 v1(-307,-74)
D23_R: D14.2 U2.20 | length 366.3
  Top Layer w7.87: v1(-339,-81) -339,-49 -325,-35 -325,8 -313,20 D14.2
  Bottom Layer w7.87: U2.20 -356,-104.02 -339,-87.02 v1(-339,-81)
D24_B: D15.4 U2.25 | length 545.1
  Top Layer w7.87: v1(-327.25,-272.25) D15.4
  Bottom Layer w7.87: U2.25 -597.76,-202.44 -632.81,-237.49 -632.81,-270 -620,-282.81 -337.81,-282.81 v1(-327.25,-272.25)
D24_G: D15.3 U2.27 | length 676.7
  Top Layer w7.87: D15.3 -254.87,-120 v1(-230,-120)
  Bottom Layer w7.87: U2.27 -303.78,-241.81 -300.72,-238.75 -144.68,-238.75 -133.93,-228 -133.93,-150.07 -167.81,-116.19 -230.19,-116.19 -234,-120 v1(-230,-120)
D24_R: D15.2 U2.26 | length 634.8
  Top Layer w7.87: D15.2 -214.63,-95.37 -200.19,-109.81 v1(-200.19,-139)
  Bottom Layer w7.87: U2.26 -167.13,-222.13 -154.06,-209.06 -154.06,-164.94 -180,-139 v1(-200.19,-139)
D25_B: D16.4 U2.53 | length 1387.2
  Top Layer w7.87: v1(-317,318) -317,303 -420,200 -420,-92.81 -390,-122.81 -390,-247 -340,-297 -268.72,-297 D16.4
  Bottom Layer w7.87: U2.53 -820.06,210.94 -818,213 -733,213 -630.13,315.87 -319.13,315.87 v1(-317,318)
D25_G: D16.3 U2.51 | length 977.3
  Top Layer w7.87: v1(-670,168) -493,-9 v1(-493,-189.96) ; D16.3 -179,-207.28 v1(-179,-189.96)
  Bottom Layer w7.87: U2.51 -801,168 v1(-670,168) ; v1(-493,-189.96) v1(-179,-189.96)
D25_R: D16.2 U2.52 | length 2438.8
  Top Layer w7.87: v1(-726,191.26) -519,-15.74 -519,-457 -458.74,-517.26 -458.74,-711.26 -278,-892 -36,-892 -13,-869 -13,-631 -212.97,-431.03 -212.97,-254.03 -225.43,-241.57 -225.43,-197.15 D16.2
  Bottom Layer w7.87: U2.52 v1(-726,191.26)
DATA: P1.3 U1.1 | length 972.1
  Top Layer w7.87: P1.3 17,788 69,788 471,386 471,214 v1(475,210)
  Bottom Layer w7.87: U1.1 v1(475,210)
DATA_1: U1.28 U2.1 | length 2188.9
  Bottom Layer w7.87: U2.1 -481,270 -467.44,283.56 -422,283.56 -417.44,279 -176,279 -140,315 -140,372.27 -22.27,490 135,490 383.11,738.11 653.16,738.11 1006.49,384.78 U1.28
GND: C1.1 C2.1 C4.1 P1.2 P2.2 U1.29 U1.56 U1.57 U2.29 U2.56 U2.57 | length 6506.4
  Top Layer w7.87: P2.2 145,-884 153,-892 506,-892 1018,-380 v1(1018,-222) ; v1(445,-150.28) 525,-230.28 v1(525,-324) ; v1(895,-335) 910,-320 910,-265 892,-247 v1(845,-247) 792,-300 765,-300 745,-280 745,-222.63 792.14,-175.48 794.52,-175.48 934.06,-35.94 v3(934.06,40)
  Bottom Layer w7.87: U2.57 -710,-205.73 -765.77,-261.5 ; P1.2 -160,790 -175,775 C4.1 -432.01,442.99 -646.63,442.99 -819.62,270 U2.56 -898.47,270 -932.47,236 -932.47,-229.02 -900,-261.5 U2.29 -765.77,-261.5 ; P2.2 145,-750 C1.1 C2.1 -305.68,-650 -553.89,-401.79 -625.47,-401.79 -765.77,-261.5 ; v1(445,-150.28) U1.56 ; v1(525,-324) 768,-324 v1(845,-247) ; U1.57 U1.57@785,50 ; v1(895,-335) 900,-335 910,-325 940,-325 1018,-247 v1(1018,-222) 1018,-161.78 U1.29 ; v3@924.06,50 v3(934.06,40)
  Bottom Layer w20: U1.57@785,50 v3@924.06,50
  other v1: 420,660
  other v2: 410,-700 -805,-440 -360,-400 1020,-325 1090,335
GSCLK: P1.6 P2.6 U1.55 U2.55 | length 4230.3
  Top Layer w7.87: v1(-571.11,381.09) -571.11,164.91 -471.31,65.11 -471.31,-152.42 -442.99,-180.74 -442.99,-662.01 P2.6 ; v1(43,-761) 76,-728 76,-539 91.81,-523.19 91.81,-462.31 57,-427.5 v1(57,-392.25)
  Bottom Layer w7.87: U2.55 -798.38,250.31 -668.7,380 -428.3,380 -8.3,800 185,800 240,855 P1.6 ; P2.6 -166,-761 v1(43,-761) ; v1(57,-392.25) 76,-392.25 95.5,-372.75 95.5,-349.71 40,-294.2 40,-222.73 117.58,-145.15 126.23,-136.5 398.96,-136.5 455.06,-192.6 484,-192.6 494.68,-181.92 U1.55
LAT: P1.5 P2.5 U1.3 U2.3 | length 3449
  Top Layer w7.87: P2.5 -185,-850 -427.19,-607.81 -427.19,-155.19 -455.56,-126.82 v1(-455.56,238.12) -345,348.68 -345,885 -306,924 81,924 P1.5 140,834 530,444 v1(530,195)
  Bottom Layer w7.87: U2.3 -463.05,230.63 v1(-455.56,238.12) ; U1.3 514.37,179.37 v1(530,195)
SCLK: P1.4 P2.4 U1.2 U2.2 | length 3440.8
  Top Layer w7.87: P2.4 -96.54,-850 -406,-540.54 -406,-150.68 -439.56,-117.12 -439.56,208.62 -416.19,232 v1(-416.19,243.81) -416.19,251.07 -320,347.26 -320,887.73 -300.73,907 -2,907 P1.4 507,398 v1(507,224)
  Bottom Layer w7.87: U2.2 -478.41,250.31 -460.91,267.81 -440.19,267.81 v1(-416.19,243.81) ; U1.2 494.68,197.42 497.81,200.55 497.81,214.81 v1(507,224)
SOUT: P2.3 U2.28 | length 1789.8
  Top Layer w7.87: v1(-610,-260) -608.5,-261.5 -608.5,-347.15 v1(-586,-369.65)
  Bottom Layer w7.87: v1@-608.5,-261.5 U2.28 ; v1(-586,-369.65) -548.35,-369.65 -404,-514 -57.69,-514 -1.06,-570.63 157.88,-570.63 203.28,-525.24 275.24,-525.24 298,-548 298,-884 264,-918 113,-918 P2.3
VCC: C1.2 C2.2 C4.2 D1.1 D2.1 D3.1 D4.1 D5.1 D6.1 D7.1 D8.1 D9.1 D10.1 D11.1 D12.1 D13.1 D14.1 D15.1 D16.1 D17.1 D18.1 D19.1 D20.1 D21.1 D22.1 D23.1 D24.1 D25.1 P1.1 P2.1 U1.54 U2.54 | length 11220.2
  Top Layer w7.87: v1(-905,-707) v1(-905,226) ; D16.1 -270.47,-171.53 ; D12.1@-241.26,270.47 D12.1 v2(-242.18,340.81) ; D4.1 -183,20 -175,12 -175,-42 -246,-42 -268,-20 -268,34 -276,42 -321,42 ; D5.1 -193.29,-165 -263.94,-165 -270.47,-171.53 ; D17.1@-155.32,-322.71 D17.1 -143.29,-313.34 -134.27,-313.34 -108.14,-313.34 -93.69,-327.79 -93.69,-328.42 -80.3,-341.81 -40.69,-341.81 ; D3.1 -151.26,179.55 -151.26,233.53 -187.19,269.47 -187.19,309.19 -187.19,322.19 -205.81,340.81 v2(-242.18,340.81) ; D11.1 -120.25,384.75 ; D6.1 -20,-221 -44.49,-245.49 -44.49,-338.01 -40.69,-341.81 ; v1(120,520) 190,520 196,514 196,348 175.25,327.25 D25.1 ; D7.1 128.12,-156.41 128.12,-111.88 170,-70 203,-37 203,-20 D8.1 180,-20 170,-10 170,45 166.44,48.56 125.89,48.56 36.06,48.56 D1.1 20,54.42 50,84.42 50,153 20,183 D2.1 20,255 56.08,291.08 56.08,350.73 44.31,362.5 D10.1 20,402.31 -6.25,428.56 -76.44,428.56 -120.25,384.75 ; 135,48.56 157.33,70.89 157.33,76 D9.1 157.33,148 171.33,162 280,162 302,184 302,215 ; D20.1 242.18,-271.39 335.65,-271.39 ; D24.1 292,242.18 302,232.18 302,215 ; v2(322.79,-83.05) 313.34,-92.5 313.34,-101.66 313.34,-143.29 D21.1 377.24,-207.19 417.19,-207.19 445,-235 445,-250 423.61,-271.39 335.65,-271.39 ; v1(323,-850) P2.1 245,-559.27 106.19,-420.45 106.19,-385.19 120.25,-365.4 ; D23.1@342.56,123.75 D23.1 356.47,134.16 356.47,203.53 345,215 302,215 ; D22.1 384.31,-20 434.31,-70 v1(440,-70) ; -321,42 -316,47 -316,103.2 -310,109.2 -310,139.95 D13.1 -327.25,255.74 v2(-242.18,340.81) ; -321,42 -343,20 D14.1 -378,20 -402,-4 -402,-85 -366.75,-120.25 D15.1 -321.75,-120.25 -270.47,-171.53 ; v2(-242.18,340.81) -242.18,558 -279.81,595.63 -279.81,708.12 -260,727.93 P1.1 -120.25,725.25 -120.25,384.75 ; -40.69,-341.81 D18.1 -20,-343 -12,-335 119.06,-335 119.06,-342.56 D19.1 120.25,-365.4 ; 120.25,-365.4 172.4,-417.56 267.44,-417.56 355,-330 354.81,-329.81 354.81,-290.55 335.65,-271.39
  Bottom Layer w7.87: v1(-905,-707) -678,-934 273,-934 323,-884 v1(323,-850) ; v1(-905,226) -900.37,230.63 U2.54 -738.98,230.63 -637.61,332 -392,332 -318,406 v2(-240,406) -136,406 -22,520 v1(120,520) ; P1.1 -260,785 -255,780 C4.2 ; C2.2 -228.62,-586.38 -24,-586.38 170.55,-586.38 186.93,-570 C1.2 282,-607 282,-813 P2.1 ; v2(322.79,-83.05) 324.74,-85 351,-85 365,-85 380,-70 v1(440,-70) 480.38,-70 514.37,-103.99 U1.54
pads on no net: U2.30 U2.31 U2.32 U2.33 U2.34 U2.35 U2.36 U2.37 U2.38 U2.39 U2.40 U2.41 U2.42 U2.43 U2.44 U2.45 U2.46 U2.47 U2.48 U2.49 U2.50
copper on no net:
  other v2: -135,-700

## Polygon pours and split planes (outlines as drawn)
GND on Bottom Layer "Top Layer-No Net" (solid, remove dead copper, pour order 2): -1500,1505 -1500,-1510 -1490,-1520 -1470,-1500 1500,-1500 1500,1495 1505,1500
GND on Top Layer "Top Layer-No Net" (solid, remove dead copper, pour order 4): -1510,1500 -1510,-1510 1500,-1510 1510,-1500 1510,1500

## Silkscreen, mask and mechanical layers (free items; w line width, h text height)
Top Overlay:
  circle w7.87: c0,5 r162.6
  circle w7.87: c0,0 r326.77
Mechanical 1:
  the board outline again, w10